# Altium PCB ExpansionS6_PCB.PcbDoc
Units mm, origin at the board's own origin, x right, y up, seen from the top; angles counter-clockwise.
Board outline 61 x 43 mm, 2 copper layers (Top Layer, Bottom Layer); 127 components, 73 nets, 358 pads, 196 vias.
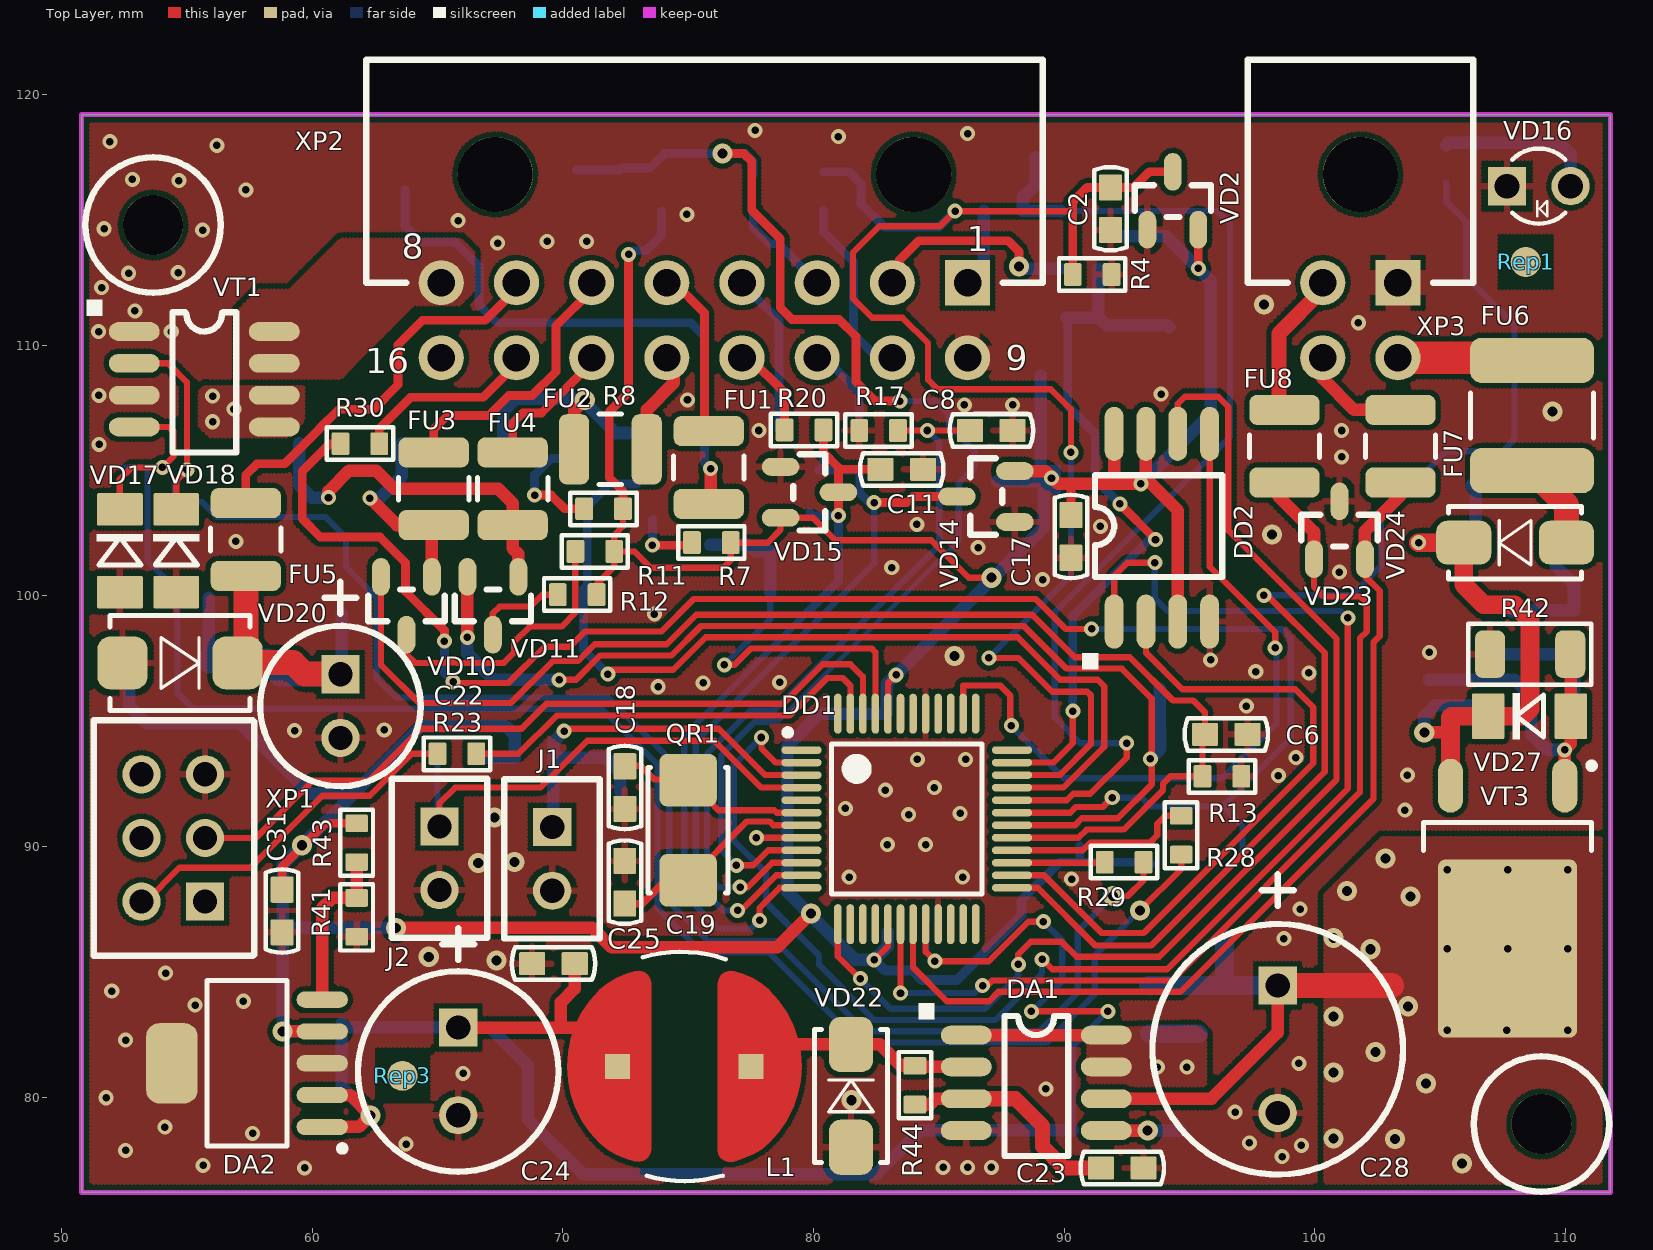
[diagram p0: Top Layer view]
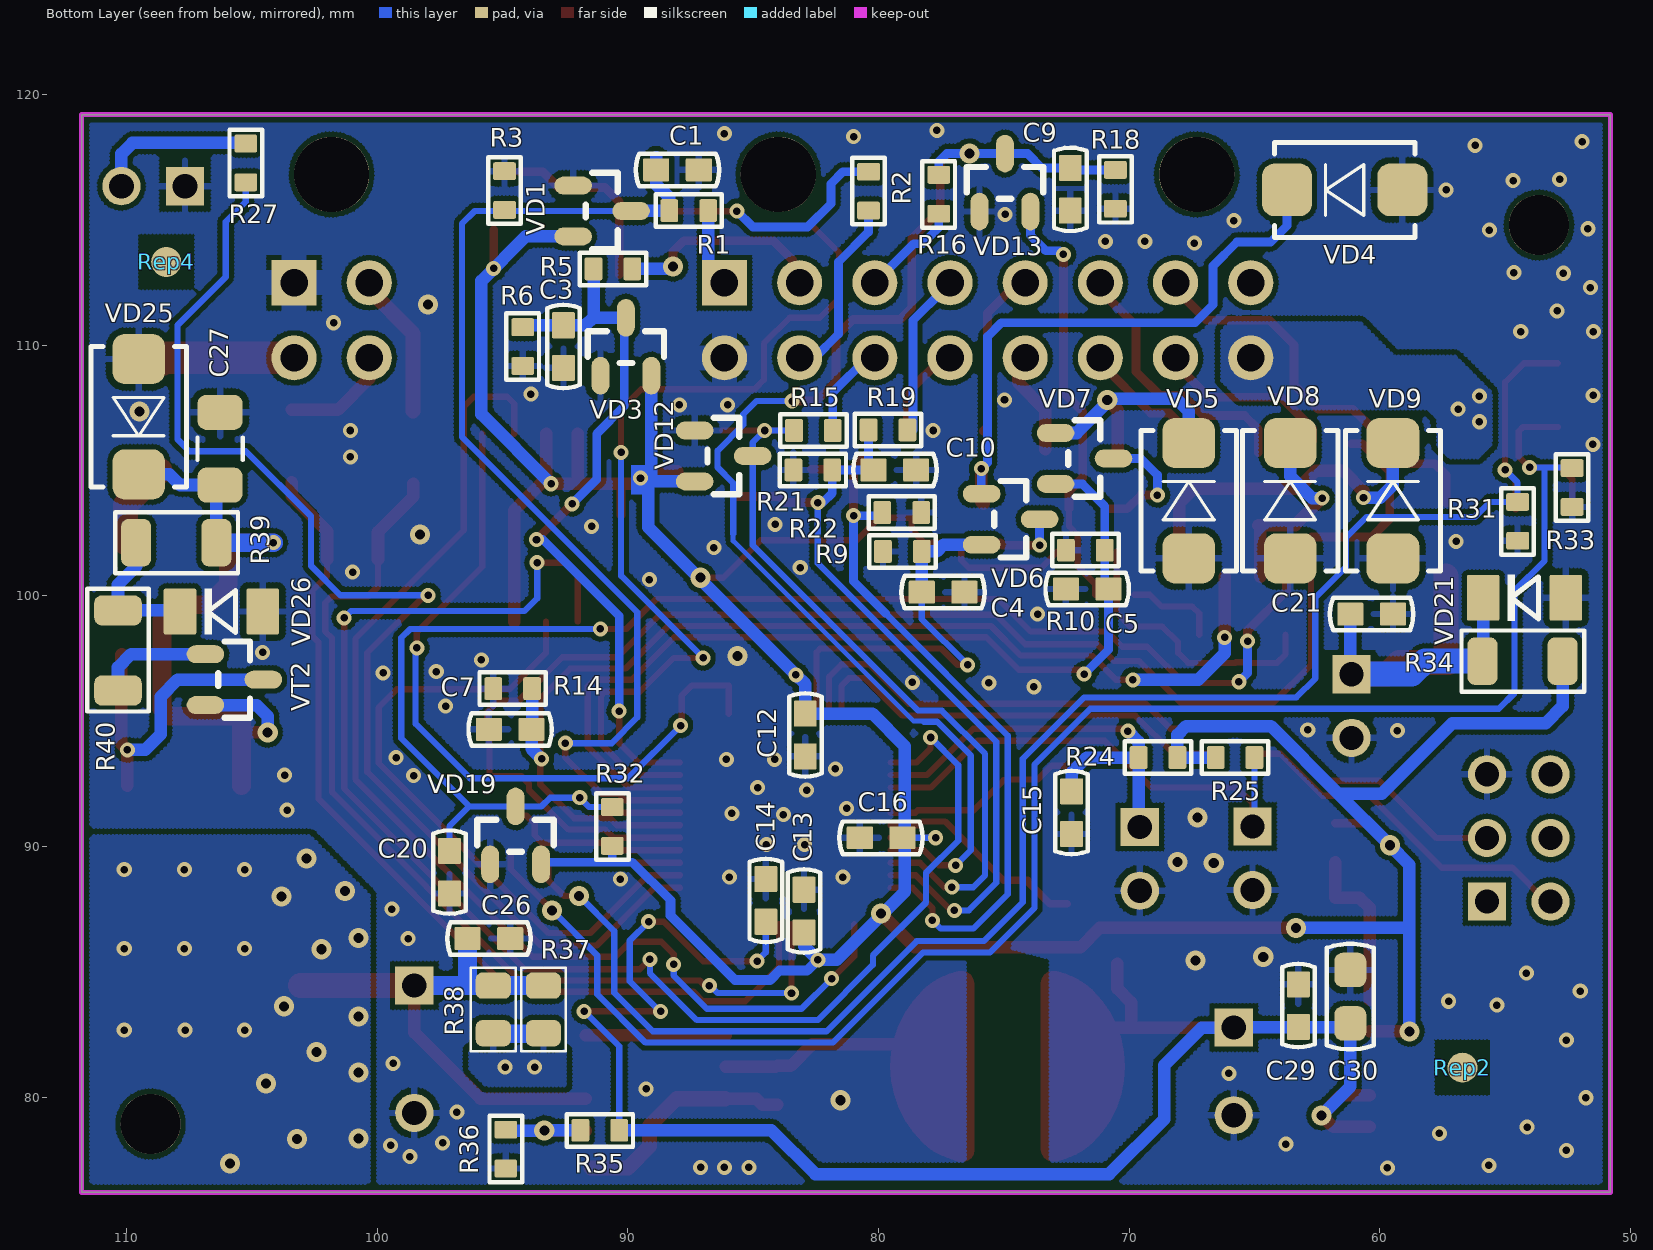
[diagram p1: Bottom Layer view, seen from below]

## Layer stack, top to bottom
Top Solder: solder mask 0.0102, Solder Resist, Dk 3.5
Top Layer: signal copper 0.0356
Dielectric 1: dielectric 0.32, FR-4, Dk 4.8
Bottom Layer: signal copper 0.0356
Bottom Solder: solder mask 0.0102, Solder Resist, Dk 3.5

## Board outline
50.8,76.2 111.8,76.2 111.8,119.2 50.8,119.2

## Design rules (kind name [scope] priority, off if disabled: settings)
Clearance [All] p1: gap=0.2 ignorepadtopadclearanceinfootprint=FALSE except(0: Arc-Hole Track-Hole SMDPad-Hole THPad-Hole Via-Hole Fill-Hole Poly-Hole Region-Hole Text-Hole)
ComponentClearance [All] p1: gap=-1 collisioncheckmode=3 verticalgap=2540 showdistances=FALSE
HoleSize [All] p1: absolutevalues=TRUE maxlimit=5 minlimit=0.025 maxpercent=80.000 minpercent=20.000
PolygonConnect PolygonConnect_1 [IsVia  OR (InComponent('DA2')AND InNet('GND'))OR (InComponent('VT3')AND InNet('VIN_F')) OR InNet('OUT1')OR InNet('OUT2') OR (InComponent('VT1')AND InNet('GND')) OR (InComponent('DA1')AND InNet('NetDA1_1'))] p1: connectstyle=Direct reliefconductorwidth=0.254 reliefentries=4 polygonreliefangle="90 Angle" airgapwidth=0.254
PolygonConnect PolygonConnect_2 [(InComponent('XP2')AND InNet('GND')) OR (InComponent('XP3')AND InNet('GND'))] p2: connectstyle=Relief reliefconductorwidth=1 reliefentries=4 polygonreliefangle="90 Angle" airgapwidth=0.2
PolygonConnect [All] p3: connectstyle=Relief reliefconductorwidth=0.25 reliefentries=4 polygonreliefangle="90 Angle" airgapwidth=0.25
RoutingVias [All] p1: holewidth=0.4 width=0.8 viastyle="Through Hole" minholewidth=0.3 minwidth=0.6 maxholewidth=0.5 maxwidth=1
SolderMaskExpansion [All] p1: expansion=0.102
Width [All] p1: maxlimit=3 minlimit=0.2 preferedwidth=0.5
28 further rules are at their usual default settings.

## Classes and differential pairs
component class Power: C23 C24 C25 C26 C27 C28 C29 C30 C31 DA1 DA2 FU6 FU7 FU8 L1 R35 R36 R37 R38 R39 R40 R41 R42 R43 R44 VD22 VD23 VD24 VD25 VD26 VD27 VT2 VT3 XP3
component class Output&1Wire: C20 C21 C22 FU5 R28 R29 R30 R31 R32 R33 R34 VD17 VD18 VD19 VD20 VD21 VT1
component class Main: C12 C13 C14 C15 C16 C17 C18 C19 DD1 DD2 J1 J2 QR1 R23 R24 R25 R27 Rep1 Rep2 Rep3 Rep4 VD16 XP1 XP2
component class Input: C1 C2 C3 R1 R2 R3 R4 R5 R6 VD1 VD2 VD3
component class Input_1: C8 C9 C10 C11 R15 R16 R17 R18 R19 R20 R21 R22 VD12 VD13 VD14 VD15
component class Input_0: C4 C5 C6 C7 FU1 FU2 FU3 FU4 R7 R8 R9 R10 R11 R12 R13 R14 VD4 VD5 VD6 VD7 VD8 VD9 VD10 VD11

## Components (designator, comment, footprint, x,y, rotation, side; value= is the part's Value field where it differs from the comment)
C1 "0.1uF" CC0603-3M 88.025,117 r0 bottom
C2 "0.1uF" CC0603-3M 91.85,115.45 r90 top
C3 "0.1uF" CC0603-3M 92.575,109.95 r90 bottom
C4 "100 pF" CC0603-3M 77.425,100.15 r0 bottom
C5 "100 pF" CC0603-3M 71.675,100.275 r180 bottom
C6 "0.1uF" CC0603-3M 96.475,94.475 r180 top
C7 "0.1uF" CC0603-3M 94.7,94.675 r180 bottom
C8 "100pF" CC0603-3M 87.1,106.6 r180 top
C9 "100pF" CC0603-3M 72.35,116.225 r90 bottom
C10 "0.1uF" CC0603-3M 79.35,105.025 r0 bottom
C11 "0.1uF" CC0603-3M 83.525,105.05 r180 top
C12 "0.1uF" CC0603-3M 82.925,94.45 r270 bottom
C13 "0.1uF" CC0603-3M 82.975,87.425 r90 bottom
C14 "0.1uF" CC0603-3M 84.5,87.85 r90 bottom
C15 "200pF" CC0603-3M 72.3,91.35 r90 bottom
C16 "0.1uF" CC0603-3M 79.9,90.35 r0 bottom
C17 "0.1uF" CC0603-3M 90.275,102.375 r90 top
C18 "22pF" CC0603-3M 72.475,92.35 r90 top
C19 "22pF" CC0603-3M 72.473,88.575 r270 top
C20 "0.1uF" CC0603-3M 97.125,88.975 r90 bottom
C21 "0.1 uF" CC0603-3M 60.325,99.275 r0 bottom
C22 "100uFx35V" CC20X2.54 61.125,96.875 r270 top
C23 "330pFx50V" CC0603-3M 92.325,77.175 r180 top
C24 "1000uFx10V" CC8X3.5 65.825,82.775 r270 top
C25 "0.1uFx16V" CC0603-3M 69.625,85.325 r0 top
C26 "0.1uFx50V" CC0603-3M 95.55,86.325 r180 bottom
C27 "0.1uFx250V" CC1206-MIDI 106.275,107.325 r270 bottom
C28 "470uF" CC16X10_CAP0.5(1)(Primary) 98.525,84.45 r270 top
C29 "0.1uFx50V" CC0603-3M 63.25,83.65 r90 bottom
C30 "4.7uFx16V" CC0805-MIDI-2M1 61.175,85.075 r270 bottom
C31 "1uFx10V" CC0603-3M 58.8,87.425 r90 top
DA1 "MC33063" SO-8 86.1,82.475 r270 top
DA2 "MCP1824T-ADJE/DC" SOT223-6 57.4,81.35 r180 top
DD1 "LPC11C24FBD48" LQFP48 83.725,91.1 r0 top
DD2 "M25P40" EIAJ_SO8 92,98.975 r90 top
FU1 "MICROSMD010F" RC1210 75.825,105.125 r90 top
FU2 "MICROSMD010F" RC1210 71.9,105.85 r0 top
FU3 "MICROSMD010F" RC1210 64.85,104.275 r90 top
FU4 "MICROSMD010F" RC1210 68,104.275 r90 top
FU5 "MICROSMD010F" RC1210 57.35,102.25 r90 top
FU6 "MF-SMDF050" MF-SMDF 108.675,107.2 r270 top
FU7 "MICROSMD010F" RC1210 103.425,105.975 r270 top
FU8 "MICROSMD010F" RC1210 98.8,105.975 r270 top
J1 "PLS-02" PIN2W 69.575,90.775 r270 top
J2 "PLS-02" PIN2W 65.075,90.8 r270 top
L1 "220uH" SDR0805 74.85,81.225 r0 top
QR1 "NX5032GA-12.000MHz LN-CD-1" AC5032_2 75,90.65 r270 top
R1 "100k" RC0603-3M 87.575,115.375 r0 bottom
R2 "100k" RC0603-3M 80.4,116.15 r90 bottom
R3 "10k" RC0603-3M 94.925,116.175 r270 bottom
R4 "10k" RC0603-3M 91.125,112.825 r180 top
R5 "100k" RC0603-3M 90.6,113.05 r0 bottom
R6 "10k" RC0603-3M 94.2,109.95 r90 bottom
R7 "4k7" RC0603-3M 75.925,102.125 r180 top
R8 "4k7" RC0603-3M 71.625,103.475 r180 top
R9 "100k" RC0603-3M 79.05,101.775 r0 bottom
R10 "100k" RC0603-3M 71.75,101.825 r0 bottom
R11 "4k7" RC0603-3M 71.275,101.775 r180 top
R12 "4k7" RC0603-3M 70.575,100.05 r180 top
R13 "100k" RC0603-3M 96.3,92.8 r0 top
R14 "100k" RC0603-3M 94.6,96.3 r0 bottom
R15 "100k" RC0603-3M 82.6,106.6 r180 bottom
R16 "100k" RC0603-3M 77.6,116.025 r270 bottom
R17 "33k" RC0603-3M 82.6,106.6 r180 top
R18 "33k" RC0603-3M 70.55,116.225 r270 bottom
R19 "100k" RC0603-3M 79.625,106.625 r180 bottom
R20 "100k" RC0603-3M 79.625,106.625 r180 top
R21 "33k" RC0603-3M 82.625,105.025 r0 bottom
R22 "33k" RC0603-3M 79.075,103.325 r180 bottom
R23 "100E" RC0603-3M 65.775,93.7 r180 top
R24 "10k" RC0603-3M 68.85,93.55 r0 bottom
R25 "10k" RC0603-3M 65.775,93.55 r180 bottom
R27 "330" RC0603-3M 105.25,117.275 r90 bottom
R28 "220" RC0603-3M 94.675,90.45 r270 top
R29 "220" RC0603-3M 92.4,89.375 r0 top
R30 "330" RC0603-3M 61.9,106.075 r180 top
R31 "10k" RC0603-3M 54.5,102.975 r270 bottom
R32 "4k7" RC0603-3M 90.625,90.8 r270 bottom
R33 "10k" RC0603-3M 52.325,104.325 r270 bottom
R34 "51" RC1206-2M 55.901,97.4 r180 bottom
R35 "3k 1%" RC0603-3M 91.125,78.675 r180 bottom
R36 "1k 1%" RC0603-3M 94.875,77.925 r90 bottom
R37 "1E" RC0805_IPC_NOM 93.375,83.5 r270 bottom
R38 "1E" RC0805_IPC_NOM 95.375,83.5 r270 bottom
R39 "220k" RC1206-2M 109.625,102.125 r180 bottom
R40 "220k" RC1206-2M 110.35,96.225 r90 bottom
R41 "15k 1%" RC0603-3M 61.775,87.175 r90 top
R42 "220k" RC1206-2M 110.2,97.675 r180 top
R43 "105k 1%" RC0603-3M 61.775,90.15 r270 top
R44 "560k" RC0603-3M 84.05,80.475 r90 top
Rep1 "REPER1.2" REPER1.2 108.425,113.325 r90 top
Rep2 "REPER1.2" REPER1.2 56.7,81.175 r90 bottom
Rep3 "REPER1.2" REPER1.2 63.6,80.85 r90 top
Rep4 "REPER1.2" REPER1.2 108.425,113.325 r90 bottom
VD1 "BAT54S" SOT-23(GSD) 92.2,116.375 r270 bottom
VD2 "BAT54S" SOT-23(GSD) 93.325,114.6 r0 top
VD3 "BAT54S" SOT-23(GSD) 91.1,108.775 r180 bottom
VD4 "P6SMBJ28A" SMB 61.4,116.2 r180 bottom
VD5 "P6SMBJ28A" SMB 67.625,103.8 r270 bottom
VD6 "BAT54A" SOT-23(123) 75.9,104.075 r0 bottom
VD7 "BAT54A" SOT-23(123) 72.95,106.5 r0 bottom
VD8 "P6SMBJ28A" SMB 63.575,103.8 r270 bottom
VD9 "P6SMBJ28A" SMB 59.475,103.8 r270 bottom
VD10 "BAT54A" SOT-23(123) 64.775,100.775 r90 top
VD11 "BAT54A" SOT-23(123) 68.225,100.775 r90 top
VD12 "BAT54S" SOT-23(GSD) 87.35,106.6 r270 bottom
VD13 "BAT54S" SOT-23(GSD) 75.975,115.325 r180 bottom
VD14 "BAT54S" SOT-23(GSD) 88.05,102.95 r90 top
VD15 "BAT54S" SOT-23(GSD) 78.675,105.15 r270 top
VD16 "BL-B45V1-L" LED3 107.675,116.35 r0 top
VD17 "BZV55C5V6" SOD-80 52.325,101.8 r270 top
VD18 "BZV55C5V6" SOD-80 54.575,101.8 r270 top
VD19 "BAT54S" SOT-23(GSD) 95.5,89.275 r180 bottom
VD20 "SMBJ5.0A" SMB 54.725,97.325 r180 top
VD21 "BZV55C3V6" SOD-80 54.225,99.925 r180 bottom
VD22 "SS14" SMA 81.5,80.05 r90 top
VD23 "PESD2CAN" SOT-23(123) 99.975,101.45 r270 top
VD24 "GS1M" SMA 108,102.125 r180 top
VD25 "SMBJ150A" SMB 109.525,107.15 r90 bottom
VD26 "BZV55C36" SOD-80 106.225,99.375 r180 bottom
VD27 "BZV55C15" SOD-80 108.575,95.2 r0 top
VT1 "IRF9956" SO-8 52.9,110.55 r270 top
VT2 "BC856B" SOT-23(123) 106.875,97.675 r0 bottom
VT3 "IRFR9220" D-PAK(TO-252AA) 107.7,87.925 r270 top
XP1 "PLD-06" PIN6 55.725,87.8 r90 top
XP2 "MIF2X08PRP" MIF2X08PRP 86.15,112.498 r90 top
XP3 "MIF2X02PRP" MIF2X02PRP 103.325,112.498 r90 top

## Footprints (in the part's own frame and the unit in brackets; to place one, negate y for a bottom-side part, rotate by r counter-clockwise, add the part's x,y. Pads: shape width x height; smd on the part's side, far side on the other; paste and mask are expansions set on the pad)
AC5032_2 [mm]
  rrect30% 2.1x2.3 smd: 1(-2,0) 2(2,0)
  silkscreen extent -2.5,-1.6 2.5,1.6
CC8X3.5 [mil]
  rect 60x60 hole 38: 1(0,0)
  round 60 hole 38: 2(137.8,0)
  silkscreen extent -156,-157 226,157
CC16X10_CAP0.5(1)(Primary) [mil]
  round 60 hole 38: 1(200,0)
  rect 60x60 hole 38: 2(0,0)
  silkscreen extent -175,-197 297,197
CC20X2.54 [mil]
  rect 60x60 hole 38: 1(0,0)
  round 60 hole 38: 2(100,0)
  silkscreen extent -145,-126 176,126
CC0603-3M [mil]
  rrect10% 40.98x35.98 smd paste-1000: 1(-33.5,0) 2(33.5,0)
  silkscreen extent -65,-26 65,26
CC0805-MIDI-2M1 [mil]
  rrect50% 54x50 smd: 1(0,0) 2(84,0)
  silkscreen extent -41,-37 125,37
CC1206-MIDI [mm]
  rrect50% 1.4x1.8 smd: 1(0,0) 2(2.9,0)
  silkscreen extent 1,-0.9 1.9,0.9
D-PAK(TO-252AA) [mm]
  oval 2.15x1 smd: 1(-4.5,2.28) 2(-4.5,-2.28)
  rrect10% 7.1x5.55 smd: 3(2,0)
  silkscreen extent -5.42,-3.35 -1.92,3.47
EIAJ_SO8 [mil]
  oval 85x29.53 smd: 1(0,0) 2(0,-50) 3(0,-100) 4(0,-150) 5(295,-150) 6(295,-100) 7(295,-50) 8(295,0)
  silkscreen extent -75,-170 230,50
LED3 [mil]
  rect 60x60 hole 39: 1(0,0)
  round 60 hole 39: 2(100,0)
  silkscreen extent 8,-59 92,59
LQFP48 [mm]
  oval 1.6x0.3 smd: 1(-4.2,2.75) 2(-4.2,2.25) 3(-4.2,1.75) 4(-4.2,1.25) 5(-4.2,0.75) 6(-4.2,0.25) 7(-4.2,-0.25) 8(-4.2,-0.75) 9(-4.2,-1.25) 10(-4.2,-1.75) 11(-4.2,-2.25) 12(-4.2,-2.75) 25(4.2,-2.75) 26(4.2,-2.25) 27(4.2,-1.75) 28(4.2,-1.25) 29(4.2,-0.75) 30(4.2,-0.25) 31(4.2,0.25) 32(4.2,0.75) 33(4.2,1.25) 34(4.2,1.75) 35(4.2,2.25) 36(4.2,2.75)
  oval 0.3x1.6 smd: 13(-2.75,-4.2) 14(-2.25,-4.2) 15(-1.75,-4.2) 16(-1.25,-4.2) 17(-0.75,-4.2) 18(-0.25,-4.2) 19(0.25,-4.2) 20(0.75,-4.2) 21(1.25,-4.2) 22(1.75,-4.2) 23(2.25,-4.2) 24(2.75,-4.2) 37(2.75,4.2) 38(2.25,4.2) 39(1.75,4.2) 40(1.25,4.2) 41(0.75,4.2) 42(0.25,4.2) 43(-0.25,4.2) 44(-0.75,4.2) 45(-1.25,4.2) 46(-1.75,4.2) 47(-2.25,4.2) 48(-2.75,4.2)
  silkscreen extent -4.87,-3 3,3.57
MF-SMDF [mm]
  rrect50% 1.8x4.95 smd: 1(-2.2,0) 2(2.2,0)
  silkscreen extent -0.9,-2.45 0.9,2.45
MIF2X02PRP [mm]
  rect 1.8x1.8 hole 1.1: 1(0,0)
  round 1.8 hole 1.1: 2(0,3) 3(-3,0) 4(-3,3)
  round 3 hole 3 unplated: 5(4.32,1.5)
  silkscreen extent 0,-3 8.9,6
MIF2X08PRP [mm]
  rect 1.8x1.8 hole 1.1: 1(0,0)
  round 1.8 hole 1.1: 2(0,3) 3(0,6) 4(0,9) 5(0,12) 6(0,15) 7(0,18) 8(0,21) 9(-3,0) 10(-3,3) 11(-3,6) 12(-3,9) 13(-3,12) 14(-3,15) 15(-3,18) 16(-3,21)
  round 3 hole 3 unplated: 17(4.32,2.15) 18(4.32,18.85)
  silkscreen extent 0,-3 8.9,24
PIN2W [mil]
  rect 60x60 hole 38: 1(0,0)
  round 60 hole 38: 2(100,0)
  silkscreen extent -75,-75 175,75
PIN6 [mil]
  rect 60x60 hole 38: 1(0,0)
  round 60 hole 38: 2(0,100) 3(100,0) 4(100,100) 5(200,0) 6(200,100)
  silkscreen extent -85,-77 285,175
RC0603-3M [mm]
  rrect20% 0.71x0.91 smd paste-25.4: 1(-0.775,0) 2(0.775,0)
  silkscreen extent -1.32,-0.65 1.33,0.65
RC0805_IPC_NOM [mm]
  rrect50% 1.05x1.4 smd: 1(-0.95,0) 2(0.95,0)
  silkscreen extent -1.67,-0.89 1.67,0.89
RC1206-2M [mm]
  rrect50% 1.2x1.9 smd: 1(0,0) 2(3.2,0)
  silkscreen extent -0.84,-1.22 4.06,1.22
RC1210 [mm]
  rrect50% 1.2x2.8 smd: 1(-1.45,0) 2(1.45,0)
  silkscreen extent -0.45,-1.4 0.45,1.4
REPER1.2 [mm]
  round 1.2 smd paste-25.4 mask-25.4: 1(0,0)
  Top Layer pour cut-out: -1.2,-1.2 1.2,-1.2 1.2,1.2 -1.2,1.2
SDR0805 [mm]
  rect 1x1 smd paste-25.4 mask-25.4: 1(-2.667,0) 2(2.667,0)
  Top Layer region: -1.327,3.319 -1.362,3.503 -1.461,3.66 -1.612,3.771 -1.792,3.818 -1.977,3.797 -2.318,3.69 -2.706,3.535 -3.065,3.321 -3.387,3.053 -3.392,3.047 -3.771,2.627 -4.09,2.16 -4.345,1.654 -4.53,1.119 -4.642,0.565 -4.68,0 -4.642,-0.565 -4.53,-1.119 -4.345,-1.654 -4.09,-2.16 -3.771,-2.627 -3.392,-3.047 -3.381,-3.059 -3.063,-3.323 -2.709,-3.534 -2.325,-3.688 -1.996,-3.791 -1.806,-3.813 -1.62,-3.764 -1.465,-3.65 -1.363,-3.488 -1.327,-3.299
  Top Layer region: 1.327,-3.319 1.362,-3.503 1.461,-3.66 1.612,-3.771 1.792,-3.818 1.977,-3.797 2.318,-3.69 2.706,-3.535 3.065,-3.321 3.387,-3.053 3.392,-3.047 3.771,-2.627 4.09,-2.16 4.345,-1.654 4.53,-1.119 4.642,-0.565 4.68,0 4.642,0.565 4.53,1.119 4.345,1.654 4.09,2.16 3.771,2.627 3.392,3.047 3.381,3.059 3.063,3.323 2.709,3.534 2.325,3.688 1.996,3.791 1.806,3.813 1.62,3.764 1.465,3.65 1.363,3.488 1.327,3.299
  silkscreen extent -1.66,-4.57 1.64,4.57
SMA [mm]
  rrect50% 2.2x1.75 smd: 1(-2.05,0) 2(2.05,0)
  silkscreen extent -2.65,-1.45 2.65,1.45
SMB [mm]
  rrect50% 2x2.1 smd: 1(2.3,0) 2(-2.3,0)
  silkscreen extent -2.8,-1.9 2.8,1.9
SO-8 [mil]
  oval 29.53x80 smd: 1(0,0) 2(50,0) 3(100,0) 4(150,0) 5(150,220) 6(100,220) 7(50,220) 8(0,220)
  silkscreen extent -50,-75 190,160
SOD-80 [mm]
  rrect10% 1.3x1.83 smd paste-25.4: 1(1.651,0) 2(-1.651,0)
  silkscreen extent -0.66,-0.91 0.56,0.91
SOT223-6 [mm]
  oval 2.05x0.65 smd: 1(-3,2.54) 2(-3,1.27) 3(-3,0) 4(-3,-1.27) 5(-3,-2.54)
  rrect50% 2.05x3.2 smd: 6(3,0)
  silkscreen extent -3.93,-3.3 1.6,3.52
SOT-23(123) [mil]
  oval 59.06x28.07 smd: 1(-0.5,0) 2(-0.5,80) 3(-91.5,40)
  silkscreen extent -70,-20 -20,100
SOT-23(GSD) [mil]
  oval 28.07x59.06 smd: 1(0,0.5) 2(80,0.5) 3(40,91.5)
  silkscreen extent -20,20 100,70

## Part data
C1 C2 C3 C4 C5 C6 C7 C8 C9 C10 C11 C12 C13 C14 C15 C16 C17 C18 C19 C20 C21 C23 C25 C26 C29 C31: library part CC0603, "CC0603"
C22: library part CAP0.25, "CAP0.25"
C24: library part CAP0.35, "CAP0.35"
C27: library part CC1206, "CC1206"
C28: library part CAP0.5(1), "CAP0.5(1)"
C30: library part CC0805, "CC0805"
DA1: library part MC34063, "MC34063"
DA2: "300 mA, Low Voltage, Low Quiescent Current LDO Regulator, 5-Pin SOT-223, Extended Temperature, Tape and Reel"
DD2: library part S25FL016A0LMFI01, "S25FL016A0LMFI01"
FU1 FU2 FU3 FU4 FU5 FU7 FU8: library part MICROSMD, "MICROSMD"
FU6: library part MF-SMDF, "MF-SMDF"
L1: library part SDR0805, "SDR0805"
QR1: library part AC5032_2, "AC5032/2"
R1 R2 R3 R4 R5 R6 R7 R8 R9 R10 R11 R12 R13 R14 R15 R16 R17 R18 R19 R20 R21 R22 R23 R24 R25 R27 R28 R29 R30 R31 R32 R33 R35 R36 R41 R43 R44: library part RC0603, "RC0603"
R34 R39 R40 R42: library part RC1206, "RC1206"
R37 R38: library part RC0805, "RC0805"
VD1 VD2 VD3 VD19: "1.0 Ampere General Purpose Rectifier"
VD4 VD5 VD8 VD9 VD20 VD25: library part SMBJ, "SMBJ"
VD16: library part LED_3, "LED_3"
VD17 VD18: library part BZV55C3V0, "BZV55C3V0"
VD21: library part BZV55C12, "BZV55C12"
VD22: "Schottky Rectifier"
VD23: "TVS for CAN"
VD26 VD27: library part BZV55C12, "Zener Voltage Regulator Diode"
VT3: "HEXFET Power MOSFET"
XP1: "PLD06"

## Free pads (board coordinates)
  round 2.4 hole 2.4 unplated: 0(53.65,114.8) 0(109.05,78.925)

## Via types
v1: diameter 0.6, hole 0.3, Top Layer to Bottom Layer, 160 vias
v2: diameter 0.8, hole 0.4, Top Layer to Bottom Layer, 36 vias

## Nets (pads, with @x,y where several pads share a name; then routed paths per layer and width w, separated by ;. In a path a pad name is that pad's centre, name@x,y a point inside that pad or via, vN(x,y) a via of type N, cw(c..) or ccw(c..) an arc to the next point about the centre after c; other vN are vias at no path point)
1WIRE: C20.2 DD1.31 R30.2 R32.1 VD19.3 | length 70
  Top Layer w0.25: v1(65.625,96.575) 65.675,96.525 67.825,96.525 69.275,97.975 70.275,97.975 70.875,98.575 73.925,98.575 75.225,99.875 88.875,99.875 90.07,98.68 v1(91.104,98.68) ; DD1.31 90.25,91.35 90.475,91.575 91.55,91.575 v1(91.925,91.95)
  Top Layer w0.35: R30.2 60.7,106.075 59.6,104.975 59.6,103.075 60.325,102.35 62.7,102.35 63.725,101.325 63.725,100.175 65.275,98.625 v1(65.275,98.2)
  Bottom Layer w0.25: R32.1 91.55,91.575 v1(91.925,91.95) 93.1,91.95 93.451,91.599 VD19.3 96.326,91.599 ; v1(91.104,98.68) 98.695,98.68 99.05,98.325 99.05,94.523 99.05,94.323 96.326,91.599 ; C20.2 97.125,90.8 96.326,91.599
  Bottom Layer w0.35: v1(65.275,98.2) 65.275,96.925 v1(65.625,96.575)
1WIRE_IN: R30.1 XP2.15 | length 7.4
  Top Layer w0.35: R30.1@62.675,106.175 62.675,106.675 63.925,107.925 66.825,107.925 XP2.15@68.425,109.525
1WIREPWR: FU5.2 XP2.7 | length 16.3
  Top Layer w0.35: FU5.2 57.35,104.825 57.8,105.275 58.9,105.275 60.295,106.67 60.295,106.685 60.615,107.005 60.63,107.005 61.075,107.45 62.45,107.45 63.425,108.425 63.425,110.025 64.4,111 66.9,111 XP2.7@68.425,112.525
+3.3V: C12.1 C13.1 C16.1 C17.2 C31.2 DA2.4 DD1.8 DD1.17 DD1.44 DD2.3 DD2.7 DD2.8 R7.1 R8.1 R11.1 R12.1 R24.1 R25.1 R32.2 R34.2 R43.1 VD1.2 VD2.2 VD3.2 VD12.2 VD13.2 VD14.2 VD15.2 VD19.2 | length 182.7
  Top Layer w0.25: R12.1 71.35,100.475 72.05,101.175 R11.1 ; R8.1 72.4,102.775 72.05,102.425 R11.1 ; v1(77.725,90.35) DD1.8 ; v1(82.425,85.475) 82.975,86.025 DD1.17 ; DD1.44 82.975,96.525 v1(83.3,96.85) ; v2(87.1,100.725) 86.2,100.725 84.7,102.225 80.875,102.225 79.982,103.118 VD15.2 78.688,102.638 78.175,102.125 R7.1 76.7,101.425 76.4,101.125 73.5,101.125 72.85,101.775 R11.1
  Top Layer w0.35: C31.2 58.8,89.2 60.525,90.925 R43.1 ; R8.1 72.4,104.175 71.85,104.725 71.85,107.35 72.625,108.125 v1(72.625,113.625) ; C17.2 90.275,104.425 90.325,104.475 ; v1(95.357,113.068) VD2.2
  Top Layer w0.5: v2(58.82,82.62) DA2.4 ; v2(63.35,86.75) 71.175,86.75 71.95,85.975 78.55,85.975 v2(79.9,87.325) ; VD14.2 89.257,104.982 89.764,104.475 90.325,104.475 v1(93.07,104.475) v1@93.27,104.675 ; 92,104.8 DD2.8 ; DD2.7 v1@93.27,104.675 ; DD2.3 94.54,103.405 v1@93.27,104.675
  Bottom Layer w0.25: v1(77.725,90.35) C16.1@78.95,90.35
  Bottom Layer w0.35: v1(72.625,113.625) 72.775,113.775 73.325,113.775 73.943,114.393 VD13.2 ; 88.3,87.85 89.825,89.375 93.381,89.375 VD19.2 ; 90.625,89.425 R32.2
  Bottom Layer w0.4: v1(82.425,85.475) 82.85,85.05 83.95,85.05 84.325,84.675 85.725,84.675 88.3,87.25 88.3,87.85
  Bottom Layer w0.5: R34.2 52.701,95.599 53.375,94.925 57.1,94.925 59.925,92.1 61.65,92.1 ; v2(58.82,82.62) 58.82,86.75 ; v2(63.35,86.75) 58.82,86.75 ; R25.1 R24.1 68.075,94.45 67.725,94.8 64.35,94.8 61.65,92.1 ; C13.1 82.975,86.025 v1(82.425,85.475) 81.675,85.475 78.95,88.2 78.95,90.35 78.95,94 80.251,95.301 C12.1 82.925,96.475 v1(83.3,96.85) 89.2,102.75 89.2,104.568 ; VD12.2 89.2,104.568 ; VD3.2 89.068,104.7 89.2,104.568 ; VD1.2 94.082,114.343 95.85,112.575 95.85,107.255 v1(93.07,104.475) ; 58.82,86.75 58.82,89.27 v2(59.6,90.05) 61.65,92.1
  other v1: 89.5,104.7
+5V: C14.1 C24.1 C25.2 C29.1 C30.2 DA2.1 DA2.2 DD1.20 L1.1 R35.2 | length 73.3
  Top Layer w0.25: DD1.20 84.475,85.8 v1(84.85,85.425) 87,85.425 88.575,87 v1(89.175,87) ; v1(88.7,83.425) v1(91.75,83.425)
  Top Layer w0.5: DA2.1 61.86,78.81 v2(62.325,79.275) 61.52,80.08 DA2.2 ; C24.1 69.925,82.775 ; C25.2 70.476,84.326 69.925,83.775 69.925,82.775 ; L1.1 72.183,82.192 ; 72.325,82.85 72.25,82.775 69.925,82.775
  Bottom Layer w0.25: C14.1 84.5,85.775 v1(84.85,85.425) ; v1(88.7,83.425) 88.725,83.425 89.925,84.625 89.925,86.25 v1(89.175,87) ; R35.2 90.35,82.025 v1(91.75,83.425)
  Bottom Layer w0.5: C30.2 61.175,80.425 v2(62.325,79.275) ; C30.2@61.35,82.784 65.816,82.784 C24.1 67.1,82.775 68.6,81.275 68.6,79.125 70.8,76.925 82.525,76.925 84.275,78.675 R35.2
ANALOG1: C1.2 DD1.32 R1.2 R3.2 VD1.3 | length 42.6
  Top Layer w0.25: DD1.32 90.114,91.85 90.364,92.1 91.05,92.1 92.5,93.55 v1(92.5,94.125)
  Bottom Layer w0.25: VD1.3 96.116,115.359 96.625,114.85 96.625,106.35 89.625,99.35 89.625,95.15 90.65,94.125 v1(92.5,94.125)
  Bottom Layer w0.5: 88.876,117.501 C1.2 88.876,116.426 88.35,115.9 R1.2 89.86,115.375 VD1.3
ANALOG1_IN: R1.1 XP2.1 | length 3
  Bottom Layer w0.5: XP2.1@86.425,112.525 86.8,112.9 R1.1
ANALOG2: C2.2 DD1.34 R2.2 R4.2 VD2.3 | length 58.5
  Top Layer w0.25: v1(87,97.525) 88.175,97.525 89.525,96.175 90.925,96.175 91.075,96.025 91.075,94.1 89.825,92.85 DD1.34 ; v1(90.275,105.725) 90.275,107.45 89.475,108.25 84.95,108.25 84.575,108.625 84.575,110.075 83.55,111.1 82.35,111.1 81.575,111.875 81.575,113.7 82.625,114.75 85.05,114.75 v1(85.65,115.35) 90.3,115.35 90.35,115.4
  Top Layer w0.35: R4.2 90.35,115.4 90.35,115.725 90.926,116.301 C2.2 92.776,116.301 93.399,116.924 VD2.3
  Bottom Layer w0.25: v1(87,97.525) 90.275,100.8 v1(90.275,105.725)
  Bottom Layer w0.35: R2.2 81.425,116.925 81.9,116.45 81.9,115.65 82.825,114.725 85.025,114.725 v1(85.65,115.35)
ANALOG2_IN: R2.1 XP2.10 | length 8
  Top Layer w0.35: XP2.10 XP2.10@83.15,110.175
  Bottom Layer w0.35: R2.1 80.4,114.525 81.6,113.325 81.6,110.45 82.552,109.498 XP2.10
ANALOG3: C3.2 DD1.35 R5.2 R6.2 VD3.3 | length 28.9
  Top Layer w0.25: DD1.35 89.575,93.35 90.35,94.125 v1(90.35,95.4)
  Top Layer w0.35: v1(92.225,103.675) v1(93.65,102.25)
  Bottom Layer w0.35: VD3.3 90.15,111.033 90.15,107.575 91.25,106.475 91.25,104.65 v1(92.225,103.675) ; v1(90.35,95.4) 90.35,99.055 90.35,99.2 93.4,102.25 v1(93.65,102.25)
  Bottom Layer w0.5: VD3.3 91.401,111.099 ; R5.2 91.375,111.125 91.401,111.099 ; R6.2 94.124,110.801 C3.2 91.699,110.801 91.401,111.099
ANALOG3_IN: R5.1 XP2.2 | length 8.4
  Top Layer w0.35: XP2.2@83.425,112.525 83.425,113.4 84.2,114.175 87.775,114.175 88.2,113.75 v2(88.2,113.15)
  Bottom Layer w0.5: v2(88.2,113.15) 88.3,113.05 R5.1
CAN_CON: DD1.25 R27.1 | length 49.5
  Top Layer w0.25: DD1.25 88.95,88.35 91.25,86.05 93.475,86.05 100.4,92.975 100.4,97.725 98.1,100.025 v1(97.975,100.025)
  Bottom Layer w0.25: v1(97.975,100.025) 101.475,100.025 102.65,101.2 102.65,103.175 105.25,105.775 107.5,105.775 107.975,106.25 107.975,110.8 106.05,112.725 106.05,114.925 105.25,115.725 R27.1
CANH: DD1.19 FU7.2 VD23.2 | length 37.6
  Top Layer w0.25: DD1.19 83.975,85.175 85.325,83.825 87.009,83.825 87.384,84.2 94.65,84.2 102.35,91.9 102.35,98.15 102.6,98.4 102.6,100.2 102.007,100.793 VD23.2
  Top Layer w0.5: VD23.2 102.007,102.582 103.425,104 FU7.2
CANL: DD1.18 FU8.2 VD23.1 | length 39.1
  Top Layer w0.25: v1(83.475,84.15) DD1.18 ; v1(86.75,84.45) 86.925,84.45 87.125,84.65 94.3,84.65 101.808,92.158 101.808,98.308 102.075,98.575 102.075,99.725 101.825,99.975 100.375,99.975 99.975,100.375 VD23.1
  Top Layer w0.5: FU8.2@98.575,104.475 98.575,103.95 99.975,102.55 VD23.1
  Bottom Layer w0.25: v1(83.475,84.15) 86.425,84.15 86.725,84.45 v1(86.75,84.45)
D_OUT1: DD1.27 R29.1 | length 3.7
  Top Layer w0.25: DD1.27 91.6,89.35 R29.1
D_OUT2: DD1.28 R28.1 | length 7.6
  Top Layer w0.25: DD1.28 90.75,89.85 91.055,90.155 92.073,90.155 92.078,90.15 92.722,90.15 92.727,90.155 93.43,90.155 93.725,90.45 93.725,90.9 94.05,91.225 R28.1
GND: C1.1 C2.1 C3.1 C4.1 C5.1 C6.1 C7.1 C8.1 C9.1 C10.1 C11.1 C12.2 C13.2 C14.2 C15.1 C16.2 C17.1 C18.1 C19.1 C20.1 C21.1 C22.2 C23.1 C24.2 C25.1 C26.2 C27.1 C28.1 C29.2 C30.1 C31.1 DA1.4 DA2.3 DA2.6 DD1.21 DD1.41 DD2.4 J1.2 J2.2 R3.1 R4.1 R6.1 R9.2 R10.2 R13.2 R14.2 R17.2 R18.2 R21.2 R22.2 R31.2 R33.2 R36.1 R41.1 R42.2 VD1.1 VD2.1 VD3.1 VD4.1 VD5.1 VD8.1 VD9.1 VD12.1 VD13.1 VD14.1 VD15.1 VD16.1 VD17.1 VD18.1 VD19.1 VD20.1 VD21.1 VD22.1 VD23.3 VD25.1 VD26.1 VT1.1 VT1.3 XP1.5 XP2.9 XP3.1
  other v1: 59.7,77.175 85.175,77.2 86.15,77.2 87.1,77.2 55.65,77.275 98.7,77.625 52.55,77.875 99.475,78.075 63.75,78.125 97.4,78.175 57.625,78.55 54.125,78.8 96.825,79.4 51.775,79.975 89.275,80.325 66.025,80.95 99.375,81.35 52.55,82.275 55.325,83.675 57.25,83.825 52,84.225 54.15,84.95 98.775,86.325 99.425,87.5 90.3,88.7 81.425,88.775 85.95,88.775 82.95,90.075 84.475,90.075 83.8,91.275 85.85,91.325 103.6,91.45 81.275,91.525 82.875,92.25 84.825,92.35 98.55,92.825 103.697,92.85 81.725,93.1 84.15,93.475 86.075,93.475 99.25,93.55 59.3,94.625 62.875,94.65 97.275,95.6 73.8,96.375 75.6,96.525 78.65,96.55 99.775,96.925 97.65,96.975 95.85,97.45 104.575,97.75 73.65,99.275 89.15,100.65 100.991,100.95 83.125,101.125 86.575,101.925 56.95,102.175 91.45,102.775 84.125,102.85 101.075,105.55 51.5,106.05 77.825,106.6 101.075,106.6 86.025,107.625 87.95,107.625 74.975,107.825 51.484,108 93.875,108.05 51.475,110.55 54.375,110.55 101.75,110.9 52.925,111.375 51.6,112.3 52.675,112.875 54.65,112.9 67.4,114.075 69.375,114.15 70.95,114.15 55.625,114.6 51.7,114.65 65.825,114.975 74.95,115.225 57.35,116.2 54.675,116.575 52.825,116.625 56.2,117.975 51.925,118.125 81,118.325 86.15,118.45 77.675,118.575
  other v2: 81.525,79.875 67.35,85.45 64.65,85.6 66.625,89.35 68.075,89.375 67.275,91.15 85.625,97.6 98.305,102.45 109.5,107.35 97.975,111.625
INP0_1HF: C4.2 DD1.45 R9.1 VD6.2 | length 16.6
  Top Layer w0.25: v1(76.45,97.25) 76.85,97.25 77.5,97.9 82.325,97.9 82.475,97.75 DD1.45
  Bottom Layer w0.25: v1(76.45,97.25) 78.275,99.075 C4.2
  Bottom Layer w0.5: VD6.2 77.407,102.043 77.675,101.775 R9.1 C4.2
INP0_1HF_IN: FU1.2 XP2.5 | length 6.5
  Top Layer w0.35: XP2.5@74.425,112.525 75.65,111.3 75.65,106.75 FU1.2
INP0_2HF: C5.2 DD1.33 R10.1 VD7.2 | length 37.5
  Top Layer w0.25: v1(71.8,96.875) 71.975,97.05 74.4,97.05 75.7,98.35 88.15,98.35 89.85,96.65 91.35,96.65 91.6,96.4 91.6,93.973 89.977,92.35 DD1.33
  Bottom Layer w0.35: v1(71.8,96.875) 70.824,97.851 C5.2 70.975,100.426 R10.1 70.975,103.575 71.868,104.468 VD7.2
INP0_2HF_IN: FU2.2 XP2.13 | length 4.1
  Top Layer w0.5: FU2.2 73.35,107.425 74.425,108.5 XP2.13@74.425,109.525
INP0_3_IN: FU3.2 XP2.6 | length 11.2
  Top Layer w0.35: FU3.2 64.85,106.65 65.4,107.2 67.05,107.2 67.85,108 68.775,108 69.725,108.95 69.725,110.775 71.15,112.2 XP2.6
  Bottom Layer w0.5: XP2.6@71.425,112.2 XP2.6@71.425,112.525
INP0_3F: C6.2 DD1.29 R13.1 VD10.2 | length 51.4
  Top Layer w0.25: VD10.2 62.743,97.257 64.275,95.725 67.925,95.725 69.6,97.4 70.6,97.4 71.275,98.075 74.152,98.075 75.327,99.25 88.725,99.25 90.425,97.55 92.625,97.55 94.35,95.825 95.15,95.825 95.624,95.351 C6.2 95.525,94.376 R13.1 94.25,92.8 93.95,92.5 93.95,92.25 92.375,90.675 90.9,90.675 90.575,90.35 DD1.29
INP0_4_IN: FU4.2 XP2.14 | length 5.5
  Top Layer w0.35: FU4.2 68,106.9 68.4,107.3 69.15,107.3 71.15,109.3 XP2.14
INP0_4F: C7.2 DD1.30 R14.1 VD11.2 | length 45.5
  Top Layer w0.25: v1(69.85,96.65) 70.525,96.65 71.5,97.625 74.339,97.625 75.514,98.8 88.4,98.8 90.1,97.1 92.3,97.1 93.5,95.9 93.5,92.475 92.15,91.125 90.714,91.125 90.439,90.85 DD1.30
  Top Layer w0.5: v1(66.193,98.343) VD11.2
  Bottom Layer w0.5: v1(66.193,98.343) 66.193,97.707 67.25,96.65 v1(69.85,96.65) ; v1(93.45,93.5) 93.849,93.899 C7.2 93.825,94.699 R14.1
INP1_1HF: C9.2 DD1.9 R16.1 R18.1 VD13.3 | length 51.4
  Top Layer w0.25: v1(76.925,89.25) 77.6,89.25 78.2,89.85 DD1.9
  Top Layer w0.35: v2(76.374,117.649) 77.226,117.649 77.538,117.337 77.538,115.387 78.675,114.25 78.675,111.5 79.15,111.025 81.025,111.025 81.7,110.35 81.7,108.55 82.475,107.775 v1(83.45,107.775)
  Bottom Layer w0.2: 78.184,94.975 78.209,95 78.601,95 85.8,102.199 85.8,102.475
  Bottom Layer w0.25: v1(76.925,89.25) 76.325,89.85 76.325,93.634 77.666,94.975 78.184,94.975 ; v1(83.45,107.775) 84.875,107.775 85.4,107.25 85.4,106.825 86.425,105.8 86.425,105.125 85.8,104.5 85.8,102.475
  Bottom Layer w0.35: R18.1 72.274,117 C9.2 73.476,117.076 74.049,117.649 VD13.3 v2(76.374,117.649) 77.276,117.649 77.6,117.325 R16.1
INP1_1HF_IN: R16.2 XP2.3 | length 4
  Bottom Layer w0.35: R16.2 77.6,114.7 78.25,114.05 78.598,114.05 XP2.3
INP1_2HF: C8.2 DD1.10 R15.1 R17.1 VD12.3 | length 30.8
  Top Layer w0.25: v1(77.075,88.375) 77.375,88.375 78.35,89.35 DD1.10 ; R17.1 v1(84.55,106.6) C8.2
  Bottom Layer w0.25: v1(77.075,88.375) 76.225,88.375 75.75,88.85 75.75,93.695 77.48,95.425 78.425,95.425 85.026,102.026 VD12.3 85.026,106.124 v1(84.55,106.6) R15.1
INP1_2HF_IN: R15.2 XP2.11 | length 3.8
  Bottom Layer w0.35: XP2.11@80.225,109.325 80.425,109.525 81.825,108.125 R15.2
INP1_3_IN: R19.2 XP2.4 | length 6.6
  Bottom Layer w0.35: XP2.4@77.425,112.525 77.425,112.2 78.625,111 78.625,106.625 R19.2
INP1_3F: C10.2 DD1.11 R19.1 R21.1 VD14.3 | length 31.8
  Top Layer w0.25: v1(76.975,87.45) 77.114,87.45 78.514,88.85 DD1.11
  Top Layer w0.35: v1(82.425,103.725) 83.725,103.725 83.966,103.966 VD14.3
  Bottom Layer w0.25: v1(76.975,87.45) 76.4,87.45 75.3,88.55 75.3,94.175 82.425,101.3 v1(82.425,103.725)
  Bottom Layer w0.35: R19.1 80.4,105.224 C10.2 81.8,105.025 81.825,105 R21.1 81.85,104.1 82.225,103.725 v1(82.425,103.725)
INP1_4_IN: R20.2 XP2.12 | length 3.5
  Top Layer w0.35: XP2.12@77.425,109.525 78.85,108.1 R20.2
INP1_4F: C11.2 DD1.12 R20.1 R22.1 VD15.3 | length 30.4
  Top Layer w0.25: v1(77.85,87.05) 77.85,87.55 78.65,88.35 DD1.12
  Top Layer w0.35: R20.1 80.4,105.725 80.999,105.126 ; v1(80.999,103.201) VD15.3 80.999,105.126 ; C11.2 81.075,105.05 80.999,105.126
  Bottom Layer w0.25: v1(77.85,87.05) 77.525,86.725 76.225,86.725 74.85,88.1 74.85,94.425 79.725,99.3
  Bottom Layer w0.35: 79.721,99.304 80.999,100.581 v1(80.999,103.201) 79.974,103.201 R22.1
ISP_START: DD1.4 J2.1 R25.2 | length 20
  Top Layer w0.25: J2.1 65.075,91.725 65.7,92.35 69.1,92.35 70.975,94.225 76.05,94.225 77.925,92.35 DD1.4
  Bottom Layer w0.25: R25.2 65,90.875 J2.1
ISP_VAR: DD1.14
MISO: DD1.26 DD2.2 | length 26.8
  Top Layer w0.25: DD1.26 89.2,88.85 91.5,86.55 93.175,86.55 99.95,93.325 99.95,95.55 99.225,96.275 94.725,96.275 93.27,97.73 DD2.2
MOSI: DD1.38 DD2.5 | length 29.3
  Top Layer w0.25: DD1.38 85.975,96.425 87.45,96.425 87.85,96.025 v1@87.85,94.85 ; DD2.5 95.81,101.165 98.425,98.55 v1(98.425,97.925)
  Bottom Layer w0.25: v1(87.9,94.825) 90,92.725 96.3,92.725 98.475,94.9 v1@98.475,97.925
NetC21_2: C21.2 C22.1 FU5.1 R34.1 VD20.2 VD21.2 | length 18
  Top Layer w1: FU5.1 57.35,97.45 57.25,97.35 59.225,97.35 59.7,96.875 C22.1
  Bottom Layer w0.5: VD21.2 55.876,97.425 R34.1 ; C22.1 61.176,96.926 C21.2
  Bottom Layer w1: R34.1 58.2,97.4 58.725,96.875 C22.1
NetC23_2: C23.2 DA1.3 R44.1 | length 9.1
  Top Layer w0.5: R44.1 84.65,79.7 84.885,79.935 DA1.3
  Top Layer w0.6: DA1.3 88.065,79.935 89.15,78.85 89.15,78.025 90,77.175 C23.2
NetC27_2: C27.2 R39.2 VD24.2 VD25.2 VD27.2 VT2.2 VT3.2 | length 28.7
  Top Layer w0.5: v2(104.375,94.55) 105.395,94.55 105.42,94.575
  Top Layer w0.75: v1(104.15,102.125) VD24.2 105.95,100.45 106.75,99.65 107.975,99.65 108.6,99.025 108.6,95.5 108.3,95.2 VD27.2 105.47,95.2 105.42,95.15 105.42,94.575 VT3.2
  Bottom Layer w0.5: v2(104.375,94.55) 104.375,95.2 104.818,95.643 VT2.2 ; R39.2 106.425,104.275 C27.2 107.875,104.425 108.3,104.85 VD25.2
  Bottom Layer w0.75: v1(104.15,102.125) R39.2
NetDA1_1: DA1.1 DA1.7 DA1.8 R37.2 R38.2 | length 7.6
  Top Layer w0.5: DA1.1 DA1.8
  Bottom Layer w0.75: R37.2@93.4,82.525 R38.2@95.375,82.525
  other v1: 93.725,81.2 94.9,81.2
NetDA1_2: DA1.2 L1.2 R44.2 VD22.2 | length 8.4
  Top Layer w0.5: 78.075,82.3 78.275,82.1 VD22.2 82.65,82.1 83.5,81.25 R44.2 ; R44.2@84.095,81.205 DA1.2
NetDA1_5: DA1.5 R35.1 R36.2 | length 4.4
  Top Layer w0.5: DA1.5 v2(93.34,78.665)
  Bottom Layer w0.5: R35.1 93.33,78.675 v2(93.34,78.665) 94.64,78.665 R36.2@94.65,78.675
NetDA2_5: DA2.5 R41.2 R43.2 | length 6.6
  Top Layer w0.5: DA2.5 60.4,87.55 60.8,87.95 R41.2 R43.2
NetFU1_1: FU1.1 VD4.2 VD6.1 | length 23.9
  Top Layer w0.5: FU1.1@75.813,103.687 FU1.1 75.9,103.75 v1(75.9,105.075)
  Bottom Layer w0.35: VD4.2 63.7,114.775 64.35,114.125 65.7,114.125 66.65,113.175 66.65,111.625 67.375,110.9 75.1,110.9 75.65,110.35 75.65,105.325 v1(75.9,105.075) 75.9,104.088 VD6.1
NetFU2_1: FU2.1 VD5.2 VD7.1 | length 9.5
  Top Layer w0.5: FU2.1 70.45,107.4 v2(70.875,107.825)
  Bottom Layer w0.5: VD5.2 67.625,107.375 68.125,107.875 70.725,107.875 72.1,106.5 VD7.1
NetFU3_1: FU3.1 VD8.2 VD10.1 | length 8.1
  Top Layer w0.5: v1(62.3,103.9) 63.375,102.825 FU3.1 64.775,102.75 VD10.1
  Bottom Layer w0.5: v1(62.3,103.9) 62.7,103.9 63.575,104.775 VD8.2
NetFU4_1: FU4.1 VD9.2 VD11.1 | length 14.6
  Top Layer w0.5: v1(60.65,103.925) 60.65,104.175 61.475,105 62.55,105 63.275,104.275 67.425,104.275 68,103.7 FU4.1 68,101.9 68.225,101.675 VD11.1
  Bottom Layer w0.5: VD9.2 59.475,104.425 59.975,103.925 v1(60.65,103.925)
NetFU6_2: FU6.2 VD24.1 | length 3.4
  Top Layer w1: FU6.2 110.05,103.625 VD24.1
NetFU7_1: FU7.1 XP3.4 | length 4.4
  Top Layer w0.5: XP3.4 100.325,108.675 101.575,107.425 FU7.1
NetFU8_1: FU8.1 XP3.2 | length 5.8
  Top Layer w0.6: FU8.1@98.575,107.375 98.575,110.475 100.325,112.225 XP3.2
NetR7_2: R7.2 VD6.3 | length 2.7
  Top Layer w0.35: v1(73.576,102.024) 75.049,102.024 R7.2
  Bottom Layer w0.35: v1(73.576,102.024) VD6.3
NetR8_2: R8.2 VD7.3 | length 5
  Top Layer w0.35: v1(68.875,104.025) 69.525,104.025 70.075,103.475 R8.2
  Bottom Layer w0.35: v1(68.875,104.025) 68.875,104.825 69.534,105.484 VD7.3
NetR11_2: R11.2 VD10.3 | length 11.2
  Top Layer w0.25: VD10.3 63.759,97.666 64.1,97.325 65.191,97.325 65.216,97.35 65.734,97.35 65.759,97.325 67.65,97.325 68.05,97.725 68.05,98.15 68.675,98.775 69.95,98.775 70.5,99.325 R11.2
NetR12_2: R12.2 VD11.3 | length 3.8
  Top Layer w0.25: VD11.3 67.209,99.309 67.475,99.575 68.7,99.575 69.175,100.05 R12.2
NetR23_2: R23.2 XP1.2 | length 14.3
  Top Layer w0.25: XP1.2 53.35,87.8 54.7,89.15 57.525,89.15 60.4,92.025 62.3,92.025 63.975,93.7 R23.2
NetR27_2: R27.2 VD16.2 | length 6.5
  Bottom Layer w0.5: R27.2@105.25,117.975 105.35,118.075 109.775,118.075 110.215,117.635 VD16.2
NetR28_2: R28.2 R33.1 VD17.2 VT1.4 | length 71.1
  Top Layer w0.25: VD17.2 52.325,104.65 52.8,105.125 v1(54.025,105.125) 54.45,105.55 54.45,106.575 54.285,106.74 VT1.4 ; v2(93.025,87.45) 94.675,89.1 R28.2
  Bottom Layer w0.25: R33.1 52.35,105.125 53.425,105.125 ; v1(54.025,105.125) 53.425,105.125 ; v2(93.025,87.45) 91.225,85.65 91.225,84.1 89.3,82.175 81.825,82.175 78.225,85.775 75.55,85.775 73.775,87.55 73.775,93.275 71.55,95.5 55.25,95.5 54.625,96.125 54.625,100.2 53.425,101.4 53.425,105.125
NetR29_2: R29.2 R31.1 VD18.2 VT1.2 | length 67.2
  Top Layer w0.25: VT1.2 54.245,109.28 55,108.525 v1(55,105.025) 54.575,104.6 VD18.2 ; v2(91.95,88.025) 92.55,88.025 93.175,88.65 R29.2
  Bottom Layer w0.25: v1(55,105.025) 54.5,104.525 R31.1 55.6,103.75 56.2,103.15 60.525,103.15 61.35,102.325 61.35,101.15 62.575,99.925 62.575,96.7 63.325,95.95 71.8,95.95 74.25,93.5 74.25,87.775 75.8,86.225 78.475,86.225 82.075,82.625 89.014,82.625 90.55,84.161 90.55,86.625 v2(91.95,88.025)
NetR39_1: R39.1 R40.2 VD26.2 | length 5.5
  Bottom Layer w0.5: VD26.2 107.926,99.425 R40.2 110.35,100.45 109.625,101.175 R39.1
NetR40_1: R40.1 VT2.1 | length 4.6
  Bottom Layer w0.5: VT2.1 109.825,97.675 110.35,97.15 R40.1
NetR42_1: R42.1 VD27.1 VT2.3 VT3.1 | length 12.8
  Top Layer w0.5: VT3.1 v1(109.98,93.855) 110.226,94.101 VD27.1 110.226,97.649 R42.1
  Bottom Layer w0.5: VT2.3 107.966,96.659 108.65,95.975 108.65,94.475 109.27,93.855 v1(109.98,93.855)
OUT1: VT1.7 VT1.8 XP2.8
OUT2: VT1.5 VT1.6 XP2.16
  other v1: 56.025,106.95 56.875,107.45 56.025,107.975
RESET: C15.2 DD1.3 J1.1 R24.2 | length 18
  Top Layer w0.25: v1(70.05,94.6) 70.15,94.7 76.225,94.7 78.075,92.85 DD1.3
  Bottom Layer w0.5: J1.1 69.625,90.825 R24.2 ; v1(70.05,94.6) 69.625,94.175 R24.2 ; C15.2 72.3,92.95 71.7,93.55 R24.2
RXD: DD1.46 XP1.3 | length 30.8
  Top Layer w0.25: XP1.3 57.74,90.34 60.025,92.625 62.264,92.625 64.339,94.7 68.35,94.7 69.35,95.7 78.8,95.7 80.375,97.275 81.475,97.275 81.975,96.775 DD1.46
SCK: DD1.13 DD2.6 | length 47
  Top Layer w0.25: DD1.13 80.975,85.625 v1(81.875,84.725) ; v1(88.175,85.3) 88.175,85.7 88.675,86.2 89.9,86.2 90.5,85.6 93.8,85.6 100.875,92.675 100.875,98.286 96.55,102.611 96.55,107.55 96.15,107.95 94.825,107.95 94.54,107.665 DD2.6
  Bottom Layer w0.25: v1(81.875,84.725) 83.075,83.525 86.85,83.525 88.175,84.85 v1(88.175,85.3)
SS: DD1.2 DD2.1 | length 59.6
  Top Layer w0.25: v1(77.925,94.35) 77.925,93.925 78.5,93.35 DD1.2 ; v1(89.125,85.5) 89.525,85.1 94.114,85.1 101.325,92.311 v1(101.325,99.125) ; DD2.1 92,100.8 92.525,101.325 v1(93.625,101.325)
  Bottom Layer w0.25: v1(77.925,94.35) 76.825,93.25 76.825,90.234 78.109,88.95 78.109,87.766 80.225,85.65 80.225,85.275 82.425,83.075 87.25,83.075 89.125,84.95 v1(89.125,85.5) ; v1(93.625,101.325) 93.625,99.9 94.125,99.4 101.05,99.4 v1(101.325,99.125)
TXD: DD1.47 R23.1 | length 17.4
  Top Layer w0.25: R23.1 68.225,93.7 69.75,95.225 79.05,95.225 80.55,96.725 81.175,96.725 81.475,96.425 DD1.47
VIN: FU6.1 XP3.3 | length 5.4
  Top Layer w1.3: XP3.3 108.577,109.498 FU6.1
VIN_F: C26.1 C28.2 DA1.6 R37.1 R38.1 VT3.3 | length 21.3
  Top Layer w0.5: DA1.6 95.885,79.935 98.525,82.575 C28.2
  Top Layer w1: C28.2 103.075,84.45
  Bottom Layer w0.75: R37.1 R38.1 C28.2 C28.2@98.526,84.451 ; R37.1@93.4,84.425 R37.1@93.425,84.45 ; 96.401,84.526 C26.1
  other v1: 105.3,82.675 107.675,82.675 110.1,82.675 105.3,85.925 107.7,85.925 110.1,85.925 105.3,89.075 107.7,89.075 110.1,89.075
  other v2: 105.875,77.35 103.2,78.325 100.75,78.35 104.45,80.55 100.75,80.975 102.425,81.8 100.75,83.225 103.725,83.625 102.225,85.9 100.75,86.35 103.825,88 101.3,88.225 102.825,89.525
XTALIN: C18.2 DD1.6 QR1.1 | length 8
  Top Layer w0.25: C18.2@72.15,93.226 73.099,93.226 73.65,92.675 QR1.1@74.875,92.675 ; QR1.1 76.2,91.45 78.436,91.45 78.536,91.35 DD1.6
XTALOUT: C19.2 DD1.7 QR1.2 | length 8.5
  Top Layer w0.25: QR1.2 77.35,91 78.25,91 78.4,90.85 DD1.7
  Top Layer w0.3: C19.2 73.174,87.724 74.05,88.6 74.05,88.65 QR1.2
pads on no net: DD1.1 DD1.5 DD1.15 DD1.16 DD1.22 DD1.23 DD1.24 DD1.36 DD1.37 DD1.39 DD1.40 DD1.42 DD1.43 DD1.48 Rep1.1 Rep2.1 Rep3.1 Rep4.1 XP1.1 XP1.4 XP1.6 XP2.17 XP2.18 XP3.5

## Polygon pours and split planes (outlines as drawn)
GND on Top Layer "TOP" (hatched 90Degree grid 0.15 track 0.2, remove dead copper, pour order 32): 50.8,119.2 111.8,119.2 111.8,76.2 50.8,76.2
OUT1 on Top Layer "TOP_M" (hatched 90Degree grid 0.15 track 0.2, remove dead copper, pour order 24): 58.85,108.725 61.15,108.725 61.65,109.275 63.375,111 64.025,111.65 64.775,111.65 65.875,111.65 66.15,111.925 66.425,112.2 66.425,113.25 66.425,113.7 66.175,113.95 65.925,114.2 64.25,114.2 61.15,114.2 60.3,113.35 59.125,112.175 58.1,112.175 57.875,112.175 57.275,111.575 57.125,111.425 57.125,108.725
NetDA1_1 on Top Layer "TOP_R" (hatched 90Degree grid 0.15 track 0.2, remove dead copper, pour order 22): 95.625,80.475 90.975,80.475 90.975,81.2 90.975,82.725 95.35,82.775 95.625,82.5
OUT2 on Top Layer "TOP_M" (hatched 90Degree grid 0.15 track 0.2, remove dead copper, pour order 28): 59,106.375 56.025,106.375 55.925,106.375 55.575,106.725 55.525,106.775 55.525,107.975 55.525,108.125 55.75,108.35 55.775,108.325 59.625,108.325 59.625,107 59,106.375
VIN_F on Top Layer "TOP_TRANZ" (hatched 90Degree grid 0.15 track 0.2, remove dead copper, pour order 16): 111.8,90.325 102.7,90.325 100.425,88.05 100.425,76.2 111.8,76.2
GND on Bottom Layer "TOP" (hatched 90Degree grid 0.15 track 0.2, remove dead copper, pour order 30): 50.8,119.2 111.8,119.2 111.8,76.2 50.8,76.2
OUT2 on Bottom Layer "TOP_M" (hatched 90Degree grid 0.15 track 0.2, remove dead copper, pour order 26): 63.8,107.9 65.575,107.9 66.075,108.4 66.275,108.6 66.275,110.6 66.25,110.6 65.925,110.925 65.875,110.875 64.7,110.875 60.775,110.875 59.55,109.65 59.425,109.525 57.35,109.525 57,109.525 56.425,108.95 55.575,108.1 55.575,106.125 55.575,106.075 56.05,105.6 56.1,105.55 57.025,105.55 57.2,105.55 57.575,105.925 57.65,106 57.65,107 57.65,107.075 57.975,107.4 58.075,107.5 59.925,107.5 63.425,107.5 63.825,107.9
NetDA1_1 on Bottom Layer "BOT_R" (hatched 90Degree grid 0.15 track 0.2, remove dead copper, pour order 20): 92.525,83 96.275,83 96.275,81.1 95.725,80.55 95.65,80.475 92.525,80.475
VIN_F on Bottom Layer "BOT_TRANZ" (hatched 90Degree grid 0.15 track 0.2, remove dead copper, pour order 18): 111.8,90.4 102.7,90.4 100.35,88.05 100.35,76.2 111.8,76.2

## Keep-outs
Keep-Out Layer:
  the board outline again, w0.2

## Other copper
Top Layer:
  pour cut-out: 76.475,85.375 76.45,85.35 76.45,76.85 74.725,76.5 73,76.85 73,85.375 74.725,85.825
Bottom Layer:
  rectangle net +3.3V: 89.075,104.05 89.882,105.225
  pour cut-out: 76.588,85.55 76.563,85.525 76.563,77.025 74.838,76.675 73.113,77.025 73.113,85.55 74.838,86

## Silkscreen, mask and mechanical layers (free items; w line width, h text height)
Top Overlay:
  circle w0.254: c53.65,114.8 r2.7
  circle w0.254: c109.05,78.925 r2.7
  lines w0.2: 86.425,107.25 88.55,107.25
  text "1" at 86.125,113.75 h1
  text "8" at 63.575,113.45 h1
  text "9" at 87.675,109 h1
  text "16" at 62.125,108.875 h1
Mechanical 2:
  rectangle: 133.45,78.05 134.025,78.35
  rectangle: 133.125,78.35 134.225,80.35
  rectangle: 131.175,82.975 132.3,84.175
  lines w0.1: 132.225,82.975 131.175,82.975 cw(c131.175,83.575) 131.175,84.175 132.3,84.175 132.3,83.05
  lines w0.2: 131.4,83.575 133.7,83.575 133.7,82.75 133.7,77.875 133.225,78.35 ; 133.125,78.35 133.125,80.35 ; 133.75,77.875 134.225,78.35 134.225,80.375 ; 131.675,78.35 131.675,80.275 131.775,80.375 147.225,80.375 147.225,78.35 131.675,78.35
  text "Монтаж светодиода VD16" at 118.5,94.325 h2
Mechanical 3:
  rectangle: 17.975,121.3 20.45,122.325
  rectangle: 125.075,118.925 127.55,119.95
  lines w0.1: 132.225,82.975 132.262,83.012 132.3,83.05 ; 132.3,84.175 132.3,84.175
  lines w0.2: 9.1,118.65 29.1,118.65 ; 11.65,116.15 11.65,121.225 ; 14.175,116.15 14.175,121.225 ; 16.75,116.125 16.75,121.2 ; 17.975,121.325 17.975,122.325 19.2,122.325 20.45,122.325 20.45,121.3 ; 19.2,116.15 19.2,121.225 ; 21.65,116.15 21.65,121.225 ; 24.05,116.175 24.05,121.25 ; 26.6,116.15 26.6,121.225 ; 29.1,116.125 9.1,116.125 9.1,121.25 29.1,121.25 29.1,116.175 ; 123.75,116.462 128.787,116.462 ; 126.3,113.9 126.3,118.975 ; 133.125,78.35 133.225,78.35 ; 133.7,77.875 133.75,77.875 ; 128.8,113.925 128.8,119 123.75,119 123.75,113.925 128.8,113.925 ; 128.8,113.925 128.8,113.925
  text "TOP" at 20.775,122.5 h1.52
  text "TOP" at 124,120.45 h1.52
  text "9" at 9.85,119.35 h1.3
  text "10" at 11.925,119.35 h1.3
  text "11" at 14.75,119.35 h1.3
  text "12" at 17.05,119.35 h1.3
  text "13" at 19.425,119.35 h1.3
  text "14" at 21.95,119.35 h1.3
  text "15" at 24.375,119.35 h1.3
  text "16" at 26.85,119.35 h1.3
  text "XP2" at 3.875,118.025 h1.52
  text "3" at 124.425,117.125 h1.3
  text "4" at 127.15,117.1 h1.3
  text "1" at 10.05,116.825 h1.3
  text "2" at 12.475,116.825 h1.3
  text "3" at 15,116.825 h1.3
  text "4" at 17.65,116.825 h1.3
  text "5" at 20.15,116.825 h1.3
  text "6" at 22.4,116.825 h1.3
  text "7" at 25.05,116.825 h1.3
  text "8" at 27.475,116.825 h1.3
  text "XP3" at 118.6,115.725 h1.52
  text "2" at 127.2,114.6 h1.3
  text "1" at 124.7,114.45 h1.3
  text "OUTPUT PINOUT" at 8.9,113.1 h1.52
  text "OUTPUT PINOUT" at 119.6,110.925 h1.52
  text "1.GND / 2.CANL / 3.+12V / 4.CANH" at 119.975,100.8 h1.52
  text "1.Analog 1 / 2.Analog 3 / 3.Digital_H 1HF / 4.Digital_H 3 / 5.Digital_L 1HF / 6.Digital_L 3 / 7.1Wire_Power / 8.Mosfet_Input1 / 9.GND / 10.Analog 2 / 11.Digital_H 2HF / 12.Digital_H 4 / 13.Digital_L 2HF / 14.Digital_L 4 / 15.1Wire_Data / 16.Mosfet_Input2" at 9.125,71.175 h1.5

## Dimensions
131.675,78.35 to 130.575,83.575 on Mechanical 2
131.775,80.375 to 133.7,83.575 on Mechanical 2
50.8,76.2 to 50.8,119.2 on Mechanical 1
50.8,76.2 to 111.8,76.2 on Mechanical 1